# Altium PCB ECE315_S20.PcbDoc (part 1 of 2)
Units mil, origin at the board's own origin, x right, y up, seen from the top; angles counter-clockwise.
Board outline 3957.04 x 3960.03 mil, 2 copper layers (Top Layer, Bottom Layer); 148 components, 79 nets, 466 pads, 123 vias.
Unrouted connection lines stored in the file: 250.
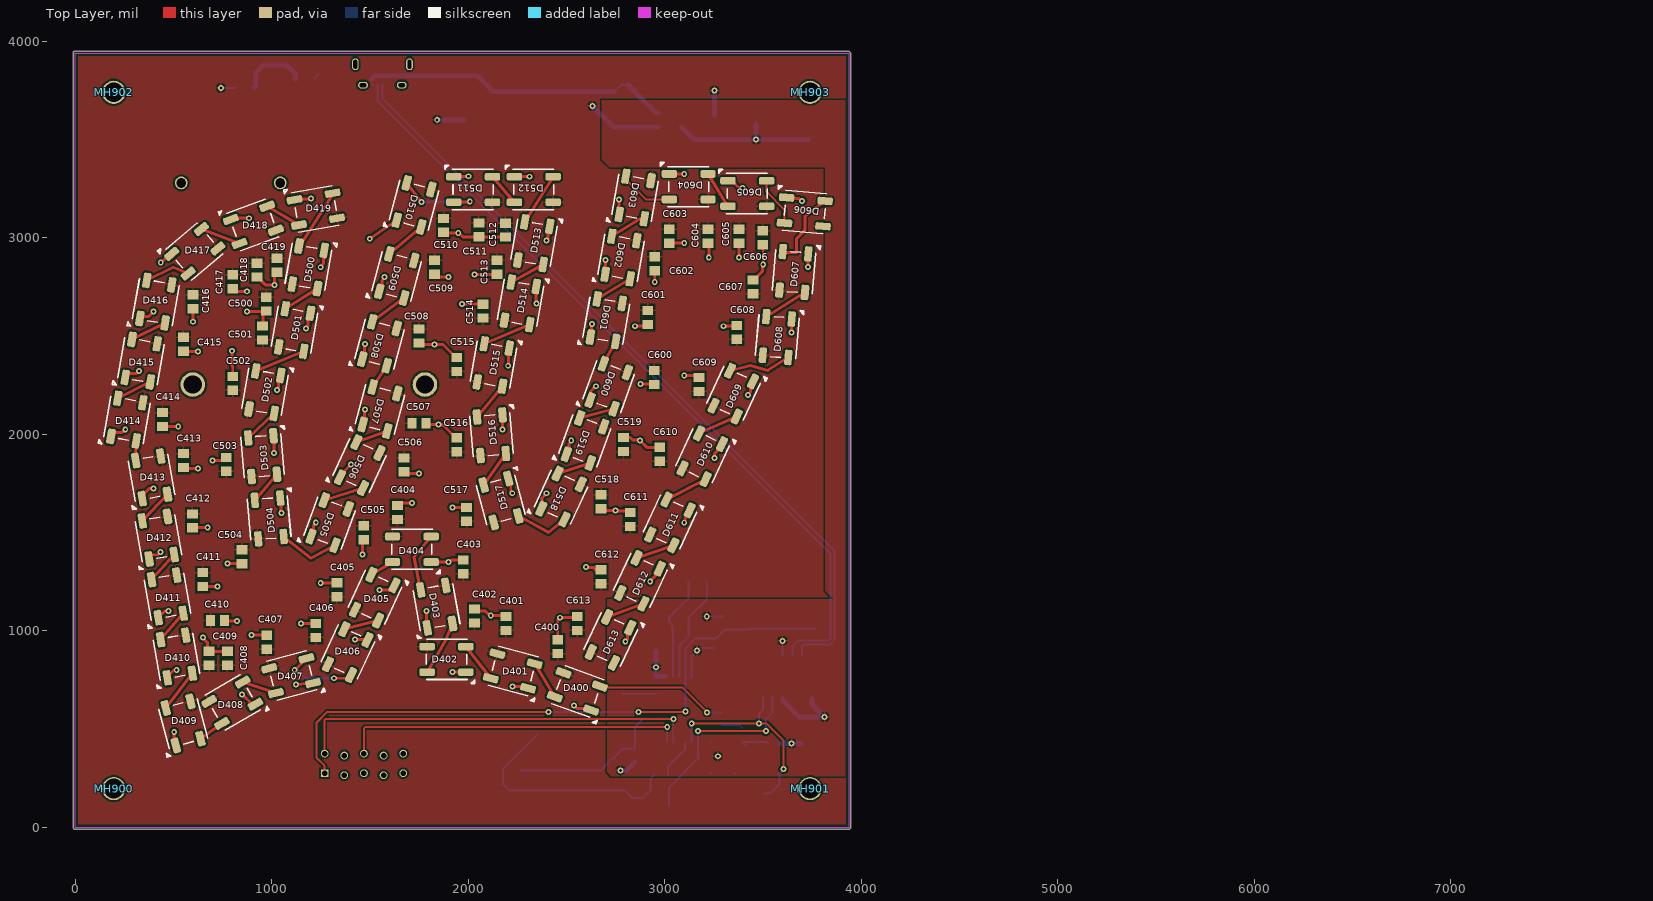
[diagram p0: Top Layer view]
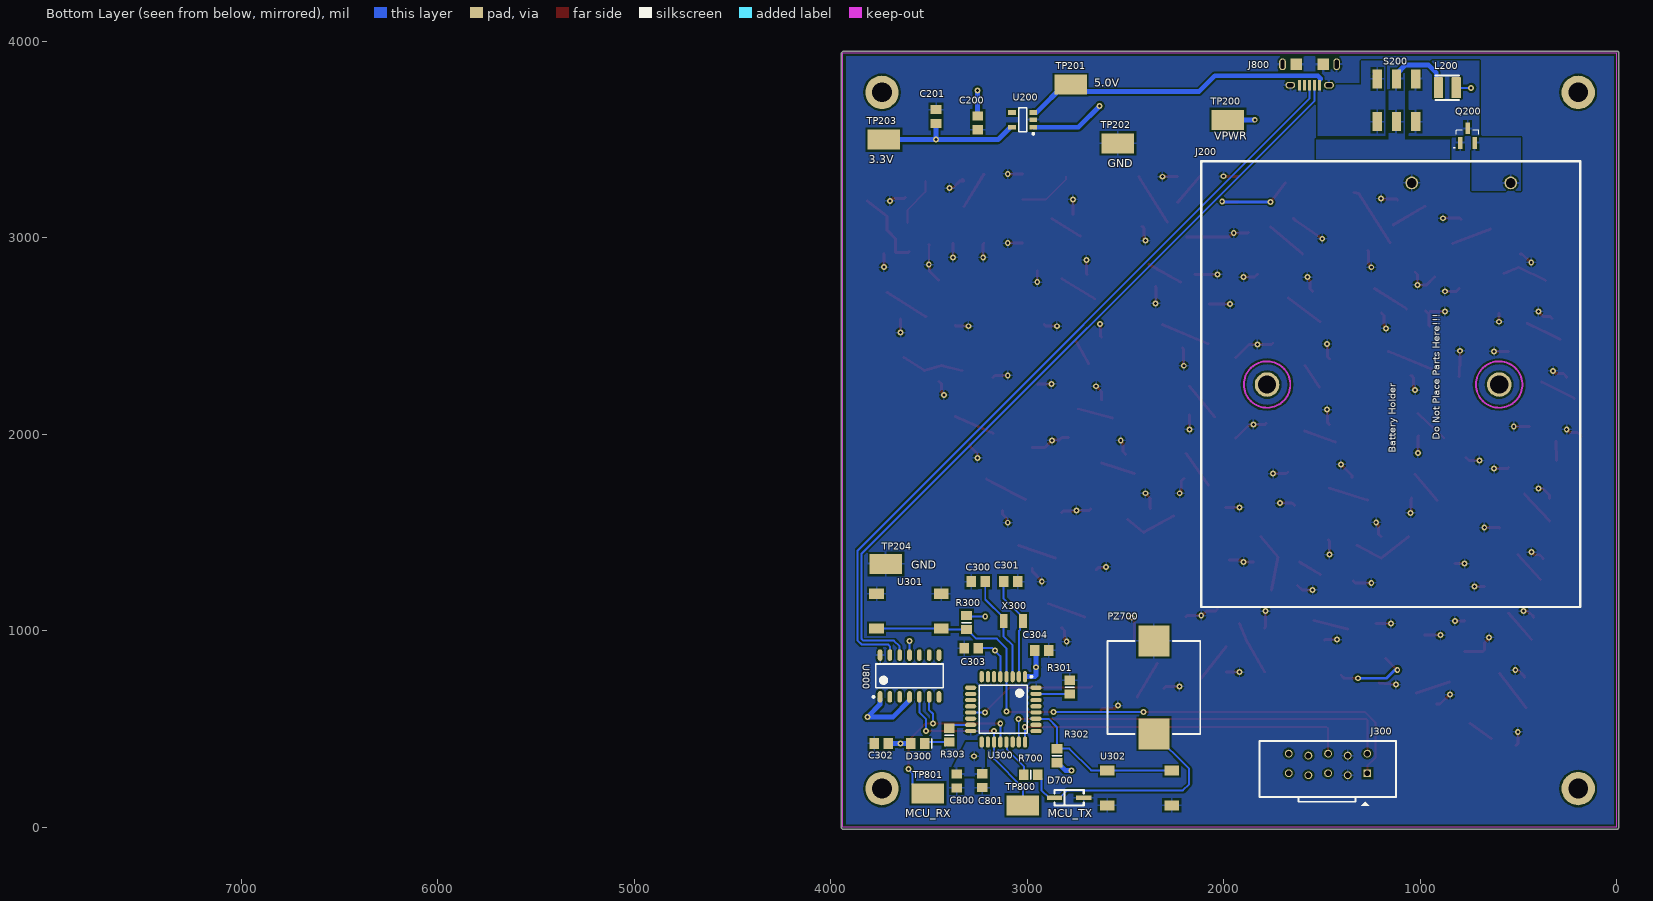
[diagram p1: Bottom Layer view, seen from below]
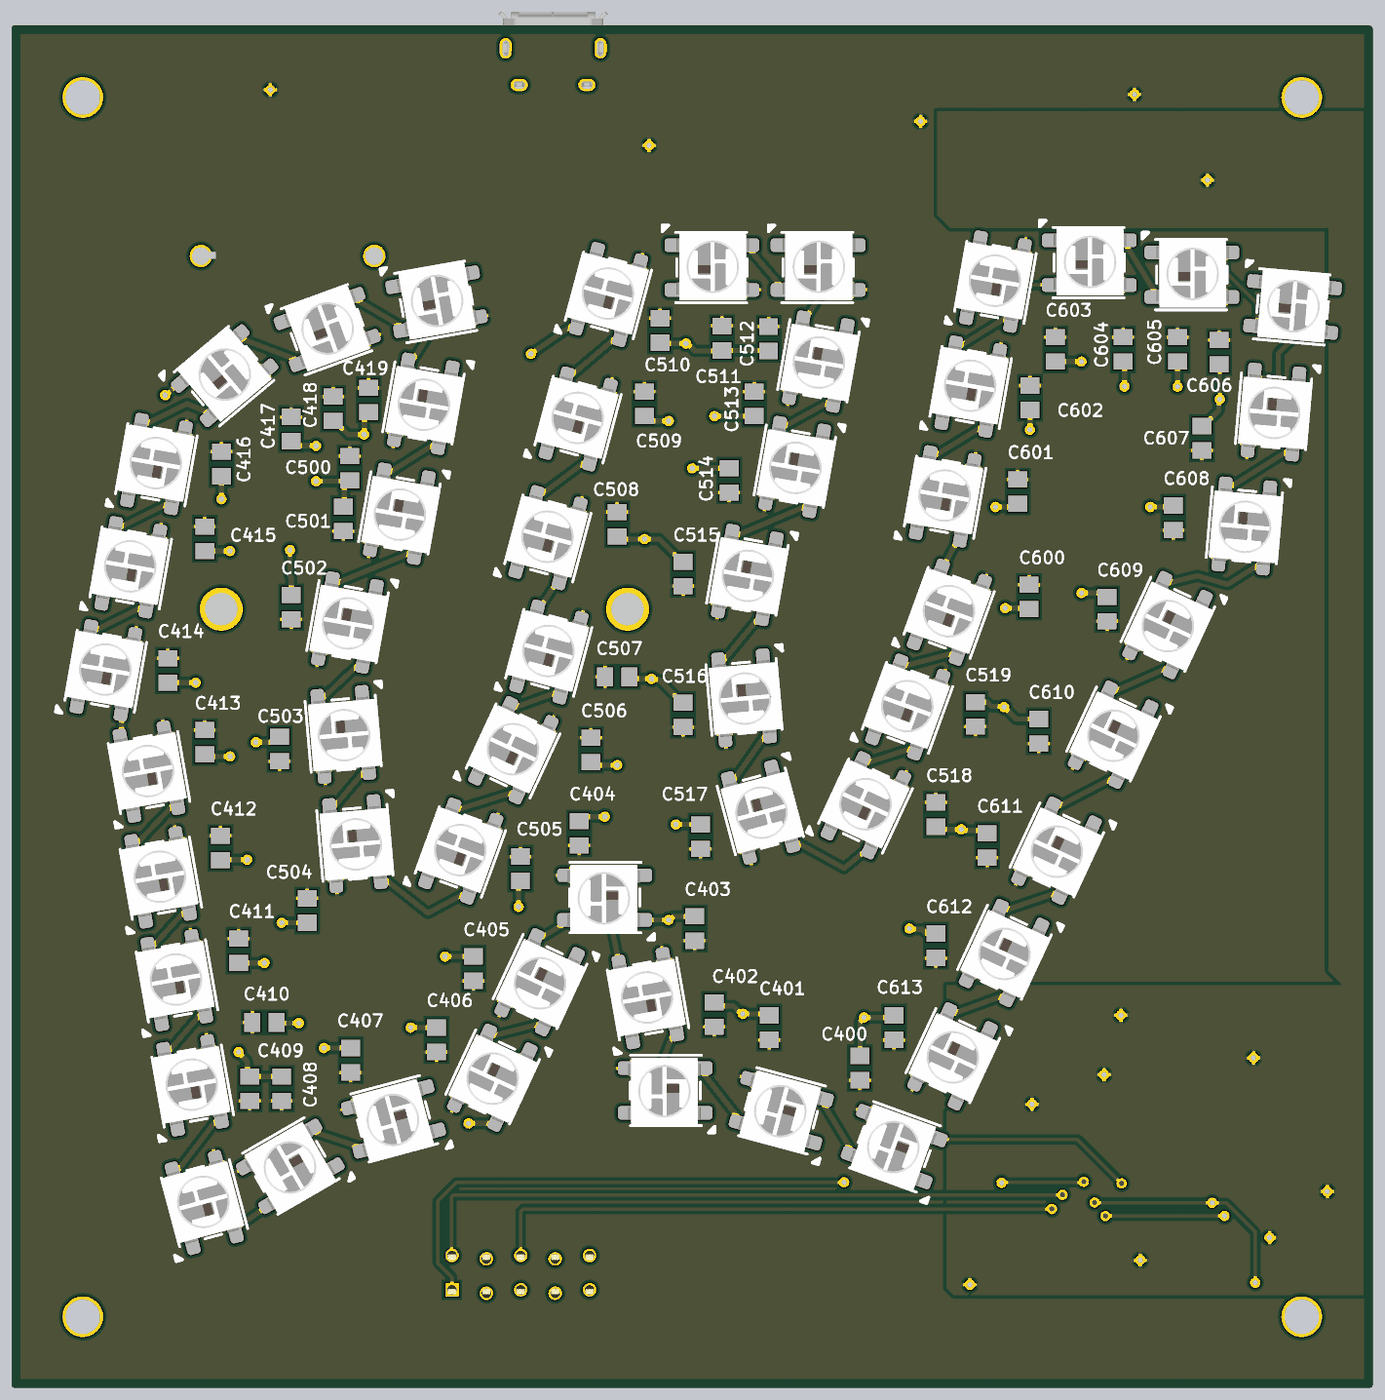
[diagram p2: 3D render of the assembled board from above, using the file's embedded part models]

## Layer stack, top to bottom
Top Solder: solder mask 0.4, Solder Resist, Dk 3.5
Top Layer: signal copper 1.4
Dielectric 1: dielectric 12.6, FR-4, Dk 4.8
Bottom Layer: signal copper 1.4
Bottom Solder: solder mask 0.4, Solder Resist, Dk 3.5

## Board outline
0,-10.02 cw(c0,0) -10.02,0 -10.02,3937.01 cw(c0,3937.01) -9.9,3938.5 cw(c0,3940) 0,3950.01 3934.02,3950.01 cw(c3934.02,3940) 3942.43,3945.43 cw(c3937.01,3937.01) 3947.02,3937.01 3947.02,0 cw(c3937.01,0) 3937.01,-10.02

## Design rules (kind name [scope] priority, off if disabled: settings)
BoardOutlineClearance [All] p1: gap=25 ignorepadtopadclearanceinfootprint=FALSE
Clearance [All] p1: gap=10 ignorepadtopadclearanceinfootprint=FALSE except(0: Arc-Hole Track-Hole SMDPad-Hole THPad-Hole Via-Hole Fill-Hole Poly-Hole Region-Hole Text-Hole; 9: Arc-SMDPad Track-SMDPad SMDPad-SMDPad)
ComponentClearance [All] p1 off: gap=10 collisioncheckmode=3 verticalgap=10 showdistances=FALSE
HoleSize [All] p1: absolutevalues=TRUE maxlimit=200 minlimit=15 maxpercent=80.000 minpercent=20.000
MinimumAnnularRing [All] p1: minimumring=6
MinimumSolderMaskSliver [All] p1: minsoldermaskwidth=0
PolygonConnect [All] p1: connectstyle=Relief reliefconductorwidth=10 reliefentries=4 polygonreliefangle="90 Angle" airgapwidth=10
RoutingCorners [All] p1: cornerstyle=Round minsetback=100 maxsetback=100
RoutingVias [All] p1: holewidth=15 width=30 viastyle="Through Hole" minholewidth=15 minwidth=30 maxholewidth=28 maxwidth=50
SilkToSilkClearance [All] p1: silktosilkclearance=1
SilkToSolderMaskClearance [IsPad] p1: minsilkscreentomaskgap=0 clearancetoexposedcopper=TRUE
SolderMaskExpansion [All] p1: expansion=4
Width Width-ArtWork [HasFootprint('BUCKYBADGER') or HasFootprint('Motion_W')] p1: maxlimit=100 minlimit=99999 preferedwidth=10 toplayer_minwidth=0 bottomlayer_minwidth=0 minimp=50.000000 maximp=50.000000 favimp=50.000000
Width Width_1 [All] p2: maxlimit=100 minlimit=10 preferedwidth=10 minimp=50.000000 maximp=50.000000 favimp=50.000000
24 further rules are at their usual default settings.

## Components (designator, comment, footprint, x,y, rotation, side; value= is the part's Value field where it differs from the comment)
C200 "10uF" CAP_0805 3252.8,3584.76 r90 bottom
C201 "10uF" CAP_0805 3464.9,3617 r270 bottom
C300 "CAP_0805_P_004.30" CAP_0805 3250,1250 r180 bottom
C301 "CAP_0805_P_004.30" CAP_0805 3085.16,1250 r0 bottom
C302 "10uF" CAP_0805 3743.7,426.62 r180 bottom
C303 "10uF" CAP_0805 3285.43,911.42 r180 bottom
C304 "10uF" CAP_0805 2926.84,900 r0 bottom
C400 "10uF" CAP_0805 2456.28,919.43 r270 top
C401 "10uF" CAP_0805 2192.46,1037.08 r270 top
C402 "10uF" CAP_0805 2032.59,1075 r270 top
C403 "10uF" CAP_0805 1975,1325 r270 top
C404 "10uF" CAP_0805 1640.11,1602.02 r270 top
C405 "10uF" CAP_0805 1332.27,1208.38 r270 top
C406 "10uF" CAP_0805 1225,1001.65 r270 top
C407 "10uF" CAP_0805 975,942.16 r270 top
C408 "10uF" CAP_0805 775,859.72 r270 top
C409 "10uF" CAP_0805 682.28,859.72 r270 top
C410 "10uF" CAP_0805 725,1052.37 r180 top
C411 "10uF" CAP_0805 650,1260.65 r90 top
C412 "10uF" CAP_0805 597.16,1559.3 r90 top
C413 "10uF" CAP_0805 551.33,1866.41 r90 top
C414 "10uF" CAP_0805 444.82,2075 r90 top
C415 "10uF" CAP_0805 551.33,2457.73 r90 top
C416 "10uF" CAP_0805 600,2675 r90 top
C417 "10uF" CAP_0805 802.5,2776.69 r90 top
C418 "10uF" CAP_0805 925,2835.43 r90 top
C419 "10uF" CAP_0805 1027.3,2860.78 r90 top
C500 "10uF" CAP_0805 972.99,2662.4 r90 top
C501 "10uF" CAP_0805 954.29,2515.55 r270 top
C502 "10uF" CAP_0805 802.5,2258.88 r270 top
C503 "10uF" CAP_0805 769,1846.87 r270 top
C504 "10uF" CAP_0805 849.35,1377.19 r90 top
C505 "10uF" CAP_0805 1469.16,1498.76 r90 top
C506 "10uF" CAP_0805 1674.29,1844.19 r90 top
C507 "10uF" CAP_0805 1750,2056.14 r180 top
C508 "10uF" CAP_0805 1750,2500 r90 top
C509 "10uF" CAP_0805 1829.76,2850 r90 top
C510 "10uF" CAP_0805 1875,3063.14 r90 top
C511 "10uF" CAP_0805 2054.76,3040.38 r90 top
C512 "10uF" CAP_0805 2190.25,3039.01 r90 top
C513 "10uF" CAP_0805 2147.99,2850 r90 top
C514 "10uF" CAP_0805 2075.73,2626.97 r270 top
C515 "10uF" CAP_0805 1942.04,2355.44 r270 top
C516 "10uF" CAP_0805 1942.04,1946.26 r270 top
C517 "10uF" CAP_0805 1992.23,1592.2 r270 top
C518 "10uF" CAP_0805 2676.9,1656.26 r90 top
C519 "10uF" CAP_0805 2790.92,1947.69 r270 top
C600 "10uF" CAP_0805 2947.35,2288.76 r90 top
C601 "10uF" CAP_0805 2914.35,2594.65 r90 top
C602 "10uF" CAP_0805 2950,2867.42 r90 top
C603 "10uF" CAP_0805 3024.18,3008.01 r90 top
C604 "10uF" CAP_0805 3221.03,3008.01 r90 top
C605 "10uF" CAP_0805 3379.31,3008.01 r90 top
C606 "10uF" CAP_0805 3500,3000 r90 top
C607 "10uF" CAP_0805 3450,2750 r270 top
C608 "10uF" CAP_0805 3367.28,2518.7 r270 top
C609 "10uF" CAP_0805 3174.63,2253.33 r270 top
C610 "10uF" CAP_0805 2975.47,1898.23 r270 top
C611 "10uF" CAP_0805 2825.47,1566.69 r270 top
C612 "10uF" CAP_0805 2676.9,1275 r270 top
C613 "10uF" CAP_0805 2555.16,1037.08 r270 top
C800 "10uF" CAP_0805 3360,235.85 r90 bottom
C801 "10uF" CAP_0805 3230,237.66 r90 bottom
D300 "LED_RED_0805.1" LED_RED_0805 3558.51,426.62 r0 bottom
D400 "WS2812B" WS2812B 2555.77,691.31 r340 top locked
D401 "WS2812B" WS2812B 2227.26,795.72 r345 top locked
D402 "WS2812B" WS2812B 1889.87,854.47 r0 top locked
D403 "WS2812B" WS2812B 1839.68,1122.73 r280 top locked
D404 "WS2812B" WS2812B 1713.79,1414.96 r0 top locked
D405 "WS2812B" WS2812B 1525,1169.02 r65 top locked
D406 "WS2812B" WS2812B 1387.16,891.66 r65 top locked
D407 "WS2812B" WS2812B 1100,771.5 r15 top locked
D408 "WS2812B" WS2812B 800,633.79 r30 top locked
D409 "WS2812B" WS2812B 550,528.99 r285 top locked
D410 "WS2812B" WS2812B 516.1,869.38 r280 top locked
D411 "WS2812B" WS2812B 470.27,1175 r280 top locked
D412 "WS2812B" WS2812B 423.39,1473.65 r280 top locked
D413 "WS2812B" WS2812B 389.2,1780.76 r280 top locked
D414 "WS2812B" WS2812B 263.99,2075 r260 top locked
D415 "WS2812B" WS2812B 336.56,2375 r260 top locked
D416 "WS2812B" WS2812B 411.08,2675 r260 top locked
D417 "WS2812B" WS2812B 609.24,2931.68 r220 top locked
D418 "WS2812B" WS2812B 907.24,3065.77 r200 top locked
D419 "WS2812B" WS2812B 1225,3146.42 r190 top locked
D500 "WS2812B" WS2812B 1186.64,2850 r80 top locked
D501 "WS2812B" WS2812B 1116.79,2530.5 r80 top locked
D502 "WS2812B" WS2812B 966.15,2214.35 r80 top locked
D503 "WS2812B" WS2812B 954.01,1888.97 r95 top locked
D504 "WS2812B" WS2812B 988.12,1571.72 r95 top locked
D505 "WS2812B" WS2812B 1295.41,1550 r250 top locked
D506 "WS2812B" WS2812B 1448.56,1843.09 r245 top locked
D507 "WS2812B" WS2812B 1551.89,2128.7 r255 top locked
D508 "WS2812B" WS2812B 1549.28,2460.79 r255 top locked
D509 "WS2812B" WS2812B 1637.05,2806.01 r255 top locked
D510 "WS2812B" WS2812B 1725.27,3167.61 r255 top locked
D511 "WS2812B" WS2812B 2025.73,3245.87 r180 top locked
D512 "WS2812B" WS2812B 2334.27,3245.87 r180 top locked
D513 "WS2812B" WS2812B 2334.84,2972.57 r80 top locked
D514 "WS2812B" WS2812B 2266.33,2666.29 r80 top locked
D515 "WS2812B" WS2812B 2128.43,2352.58 r80 top locked
D516 "WS2812B" WS2812B 2119.17,1995.32 r95 top locked
D517 "WS2812B" WS2812B 2166.93,1663.25 r105 top locked
D518 "WS2812B" WS2812B 2473.24,1683.34 r245 top locked
D519 "WS2812B" WS2812B 2594.98,1968.5 r250 top locked
D600 "WS2812B" WS2812B 2715.95,2244.37 r250 top locked
D601 "WS2812B" WS2812B 2703.78,2580.64 r260 top locked
D602 "WS2812B" WS2812B 2778.12,2899.79 r260 top locked
D603 "WS2812B" WS2812B 2850,3205 r260 top locked
D604 "WS2812B" WS2812B 3122.61,3259.99 r180 top locked
D605 "WS2812B" WS2812B 3420.85,3225.11 r180 top locked
D606 "WS2812B" WS2812B 3713.6,3131.38 r175 top locked
D607 "WS2812B" WS2812B 3658.02,2825.89 r85 top locked
D608 "WS2812B" WS2812B 3573.29,2494.86 r85 top locked
D609 "WS2812B" WS2812B 3350,2207.03 r65 top locked
D610 "WS2812B" WS2812B 3191.9,1888.25 r65 top locked
D611 "WS2812B" WS2812B 3027.31,1551.37 r65 top locked
D612 "WS2812B" WS2812B 2875,1254.18 r65 top locked
D613 "WS2812B" WS2812B 2725,953.61 r65 top locked
D700 "DIODE_4148" SOD323-12 2862.15,150 r270 bottom
J200 "BC3AAPC" BC3AAPC 185.95,1121.22 r90 bottom locked
J300 "SFH11-PBPC-D05-ST-BK" SFH11-PBPC-D05-ST-BK 1270,370 r0 bottom
J800 "USB_MICRO_B_10118194-0001LF" USB_MICRO_B 1563.9,3940 r0 bottom
L200 "SRN3015-220M" SRN3015 863.08,3763.9 r180 bottom
MH900 "MHOLE_2_55MM" MHOLE_2_55MM#1 225,200 r90 top
MH901 "MHOLE_2_55MM" MHOLE_2_55MM#2 3740.16,196.85 r90 top locked
MH902 "MHOLE_2_55MM" MHOLE_2_55MM#3 200,3760 r90 top
MH903 "MHOLE_2_55MM" MHOLE_2_55MM#4 3745,3735 r90 top
PZ700 "Peizo Buzzer" PKLCS 2356.65,712 r90 bottom
Q200 "PMOS-DMP2305U-7" SOT23 760,3520 r90 bottom
R300 "10K" RES_0805 3310.24,1042 r90 bottom
R301 "10K" RES_0805 2785,713.43 r270 bottom
R302 "10K" RES_0805 2850,364.57 r270 bottom
R303 "330" RES_0805 3397.4,468.94 r90 bottom
R700 "RES_0805_K_001.00" RES_0805 2982.65,267.66 r180 bottom
S200 "SW DPDT" DPDT 1121.85,3700 r180 bottom
TP200 "TP_1206" TP-SMC-1206 1980,3600 r180 bottom
TP201 "TP_1206" TP-SMC-1206 2780,3780 r180 bottom
TP202 "TP_1206" TP-SMC-1206 2540,3480 r180 bottom
TP203 "TP_1206" TP-SMC-1206 3730.46,3500 r180 bottom
TP204 "TP_1206" TP-SMC-1206 3720,1340 r0 bottom
TP800 "TP_1206" TP-SMC-1206 3023.55,111.42 r180 bottom
TP801 "TP_1206" TP-SMC-1206 3506.88,172.6 r180 bottom
U200 "IC-TLV733P" IC_TLV73333 3024.2,3600 r0 bottom
U300 "IC_STM32F303K8T6" LQFP32 3122.38,600 r270 bottom
U301 "SWITCH_6mm_6mm_smd" SWITCH_6mm_6mm_smd 3603.56,1100 r180 bottom
U302 "SWITCH_6mm_6mm_smd" SWITCH_6mm_6mm_smd 2430,200 r0 bottom
U800 "IC_MCP2221A" IC_MCP2221A 3600,770 r90 bottom
X300 "32.7680KHZ 12.5PF" NX3215SA-32.768K-STD-MUA-8 3071.39,1049.44 r0 bottom

## Footprints (in the part's own frame and the unit in brackets; to place one, negate y for a bottom-side part, rotate by r counter-clockwise, add the part's x,y. Pads: shape width x height; smd on the part's side, far side on the other; paste and mask are expansions set on the pad)
BC3AAPC [mm] "BATTERY HOLDER AA 3 CELL PC PIN"
  round 3.175 hole 2.37: 1(28.75,10.5) 2(28.75,40.5)
  round 1.651 hole 1.27: 3(54.82,9) 4(54.82,21.8)
  Top Layer keep-out circle w0.254: c28.75,10.5 r3
  Top Layer keep-out circle w0.254: c28.75,40.5 r3
  silkscreen extent 0,0 57.6,49, body extent 0.46,0.76 57.66,49.96, height 16.51
CAP_0805 [mm]
  rect 1.2x1.4 smd: 1(-0.9,0) 2(0.9,0)
  body extent -1.07,-0.7 1.07,0.7, height 0.7
DPDT [mm]
  rect 1.2x2.5 smd: 1(-2.5,-2.75) 2(0,-2.75) 3(2.5,-2.75) 4(-2.5,2.75) 5(0,2.75) 6(2.5,2.75)
IC_MCP2221A [mm] "SOIC, 14-Leads, Body 8.65x3.90mm, Pitch 1.27mm, IPC Medium Density"
  oval 1.5x0.6 smd: 1(-2.7,3.81) 2(-2.7,2.54) 3(-2.7,1.27) 4(-2.7,0) 5(-2.7,-1.27) 6(-2.7,-2.54) 7(-2.7,-3.81) 8(2.7,-3.81) 9(2.7,-2.54) 10(2.7,-1.27) 11(2.7,0) 12(2.7,1.27) 13(2.7,2.54) 14(2.7,3.81)
  silkscreen extent -2.82,-4.35 1.55,4.79, body extent -3,-4.35 3,4.35, height 1.75
IC_TLV73333 [mm] "SOT23, 5-Leads, Body 2.90x2.80mm, Pitch 0.95mm, IPC Medium Density"
  rect 1x0.6 smd: 1(-1.375,0.95) 2(-1.375,0) 3(-1.375,-0.95) 4(1.375,-0.95) 5(1.375,0.95)
  silkscreen extent -1.5,-1.55 0.5,1.92, body extent -1.5,-1.53 1.5,1.53, height 1.45
LED_RED_0805 [mm]
  rect 1.2x1.4 smd: 1(-0.9,0) 2(0.9,0)
  silkscreen extent -1.8,-0.6 -1.8,0.6, body extent -1.07,-0.7 1.08,0.7, height 0.8
LQFP32 [mm] "TQFP, 32-Leads, Body 7.00x7.00mm, Pitch 0.80mm, IPC Medium Density"
  oval 1.45x0.55 smd: 1(-4.225,2.8) 2(-4.225,2) 3(-4.225,1.2) 4(-4.225,0.4) 5(-4.225,-0.4) 6(-4.225,-1.2) 7(-4.225,-2) 8(-4.225,-2.8) 17(4.225,-2.8) 18(4.225,-2) 19(4.225,-1.2) 20(4.225,-0.4) 21(4.225,0.4) 22(4.225,1.2) 23(4.225,2) 24(4.225,2.8)
  oval 0.55x1.45 smd: 9(-2.8,-4.225) 10(-2,-4.225) 11(-1.2,-4.225) 12(-0.4,-4.225) 13(0.4,-4.225) 14(1.2,-4.225) 15(2,-4.225) 16(2.8,-4.225) 25(2.8,4.225) 26(2,4.225) 27(1.2,4.225) 28(0.4,4.225) 29(-0.4,4.225) 30(-1.2,4.225) 31(-2,4.225) 32(-2.8,4.225)
  silkscreen extent -4.35,-3.1 3.1,3.75, body extent -4.5,-4.5 4.5,4.5, height 1.6
MHOLE_2_55MM#1 [mm] "2.55MM Mounting Hole"
  round 3 / inner round 4.572 / far side round 4.318 hole 2.55: 1(-0.08,0.715)
MHOLE_2_55MM#2 [mm] "2.55MM Mounting Hole"
  round 3 / inner round 4.572 / far side round 4.318 hole 2.55: 1(0,0)
MHOLE_2_55MM#3 [mm] "2.55MM Mounting Hole"
  round 3 / inner round 4.572 / far side round 4.318 hole 2.55: 1(-0.504,0.08)
MHOLE_2_55MM#4 [mm] "2.55MM Mounting Hole"
  round 3 / inner round 4.572 / far side round 4.318 hole 2.55: 1(0.131,0.123)
NX3215SA-32.768K-STD-MUA-8 [mm]
  rect 1x1.8 smd: 1(-1.25,0) 2(1.25,0)
PKLCS [mm]
  rect 4x4 smd: 1(-6,0) 2(6,0)
  silkscreen extent -6,-6 6,6
RES_0805 [mm]
  rect 1.2x1.4 smd: 1(-0.9,0) 2(0.9,0)
  silkscreen extent 0,-0.6 0,0.6, body extent -1.07,-0.7 1.08,0.7, height 0.65
SFH11-PBPC-D05-ST-BK [mm]
  round 1 hole 0.7: 1(0,-0.127) 3(2.54,0.127) 4(2.54,2.667) 5(5.08,-0.127) 6(5.08,2.413) 7(7.62,0.127) 8(7.62,2.667) 9(10.16,-0.127) 10(10.16,2.413)
  rect 1x1 hole 0.7: 2(0,2.413)
  silkscreen extent -3.68,-1.78 13.97,9.4, body extent -3.73,-1.73 13.89,5.37, height 8.5
SOD323-12 [mm]
  rect 0.6x2 smd: 1(0,0) 2(0,3.75)
  silkscreen extent -1,0 1,3.8
SOT23 [mm]
  rect 1.5x0.6 smd: 1(-0.95,0.95) 2(-0.95,-0.95) 3(0.95,0)
  silkscreen extent -1.64,-1.45 0.7,1.76, body extent -1.4,-1.45 1.4,1.45, height 1.3
SRN3015 [mm]
  rrect10% 1.2x2.7 smd mask+0.102: 1(-1.15,0) 2(1.15,0)
  silkscreen extent -1.5,-1.6 1.5,1.6, body extent -1.51,-1.4 1.51,1.32, height 1.5
SWITCH_6mm_6mm_smd [mm]
  rect 1.9x1.3 smd: 1(-4.175,2.25) 2(4.175,2.25) 3(-4.175,-2.25) 4(4.175,-2.25)
  body extent -4.96,-3.02 5.04,2.98, height 4.42
TP-SMC-1206 [mm]
  rect 4.2x2.6 smd mask+0: 1(0,0)
  body extent -1.57,-0.79 1.63,0.81, height 1.22
USB_MICRO_B [mm]
  rect 0.4x1.35 smd: 1(-1.3,4.15) 2(-0.65,4.15) 3(0,4.15) 4(0.65,4.15) 5(1.3,4.15)
  rect 1.5x1.5 smd: SH1(-1.75,1.45) SH4(1.75,1.45)
  oval 0.889x1.524 hole 0.5 slot 1.15 at 90 deg: SH2(-3.5,1.45) SH5(3.5,1.45)
  oval 1.27x0.889 hole 0.55 slot 0.85 at 0 deg: SH3(-2.5,4.15) SH6(2.5,4.15)
  body extent -4.03,-1.27 4.02,4.31, height 16.51
WS2812B [mm]
  rrect50% 2x1 smd: 1(-2.5,1.65) 2(-2.5,-1.65) 3(2.5,-1.65) 4(2.5,1.65)
  silkscreen extent -2.6,-3.11 3.66,2.6, body extent -2.73,-2.53 2.62,2.42, height 1.7

## Part data
C200 C201 C302 C303 C304 C400 C401 C402 C403 C404 C405 C406 C407 C408 C409 C410 C411 C412 C413 C414 C415 C416 C417 C418 C419 C500 C501 C502 C503 C504 C505 C506 C507 C508 C509 C510 C511 C512 C513 C514 C515 C516 C517 C518 C519 C600 C601 C602 C603 C604 C605 C606 C607 C608 C609 C610 C611 C612 C613 C800 C801: library part CAP_0805_U_010.00, "CAP CER 10UF 16V X7R 0805", Case Code (Imperial)=0805, Case Code (Metric)=2012, Dielectric=X5R, Manufacturer=Samsung, Manufacturer Part Number=CL21A106KPCLQNC, Max Operating Temperature=85°C, Min Operating Temperature=-55°C, Package Quantity=1, Supplier Part Number 1=1276-2402-1-ND, Tolerance=10%, Voltage Rating=10V, Capacitance=10uF, Case/Package=0805, ComponentLink1Description=https://datasheet.ciiva.com/25730/cl21a106kpclqnc-25730594.pdf, ComponentLink1URL=https://datasheet.ciiva.com/25730/cl21a106kpclqnc-25730594.pdf, ComponentLink3Description=https://datasheet.ciiva.com/26920/getdatasheetpartid-355170-26920201.pdf, ComponentLink3URL=https://datasheet.ciiva.com/26920/getdatasheetpartid-355170-26920201.pdf, Contact Plating=Tin, Depth=1.25mm, Height=0.85mm, Length=2mm, Mount="Surface Mount", Packaging="Tape and Reel", Pricing 1="1=0.22, 10=0.148, 100=0.0749, 500=0.05122, 1000=0.04531 (USD)", Radiation Hardening=No, Stock 1=40000, Supplier 1=Digi-Key, Thickness=0.037inch, Width=0.049inch
C300 C301: "CAP CER 4.3PF 100V NP0 0805", Capacitance Value="4.3 pF", Dielectric=C0G, Manufacturer="Kyocera AVX", Manufacturer Part Number=08051A4R3CAT2A, Operating Temperature="-55 to 125 °C", Package/Case=0805, Supplier Part Number 1=478-10404-1-ND, Tolerance="0.25 pF", Voltage="100 Vdc", Category="Capacitor Ceramic Multilayer", ComponentLink1Description=https://datasheet.ciiva.com/204/ccog-204944.pdf, ComponentLink1URL=https://datasheet.ciiva.com/204/ccog-204944.pdf, ComponentLink2Description=https://datasheet.ciiva.com/11570/ccog-11570969.pdf, ComponentLink2URL=https://datasheet.ciiva.com/11570/ccog-11570969.pdf, Construction=Flat, Mounting="Surface Mount", Packaging="Tape & Reel", Pricing 1="1=0.24, 10=0.167, 100=0.0946, 500=0.0668, 1000=0.0584 (USD)", Product Depth="1.25 mm", Product Length="2.01 mm", Rad Hard=No, Stock 1=23910, Supplier 1=Digi-Key
D300: "LED SUPER RED CLR THIN 0805 SMD", Emitting Color=Red, Forward Current="30 mA", Forward Voltage="2.4 V", Manufacturer="Vishay / Lite-On", Manufacturer Part Number=LTST-C171KRKT, Operating Temp Range="-55C to 85C", Operating Temperature Classification=Industrial, Package Type="Chip Led", Power Dissipation="75 W", Reverse Voltage="5 V", Supplier Part Number 1=160-1427-1-ND, Test Current (It)="20 mA", Chip Material=AlGaInP, ComponentLink1Description=https://datasheet.ciiva.com/2110/s-110-ltst-c171krkt-2110066.pdf, ComponentLink1URL=https://datasheet.ciiva.com/2110/s-110-ltst-c171krkt-2110066.pdf, ComponentLink2Description=https://datasheet.ciiva.com/2110/s-110-ltst-c171krkt-2110067.pdf, ComponentLink2URL=https://datasheet.ciiva.com/2110/s-110-ltst-c171krkt-2110067.pdf, ComponentLink3Description=https://datasheet.ciiva.com/2110/s-110-ltst-c171krkt-2110068.pdf, ComponentLink3URL=https://datasheet.ciiva.com/2110/s-110-ltst-c171krkt-2110068.pdf, ComponentLink4Description=https://datasheet.ciiva.com/12403/lite-on-ltst-c171krkt-187201-12403781.pdf, ComponentLink4URL=https://datasheet.ciiva.com/12403/lite-on-ltst-c171krkt-187201-12403781.pdf, ComponentLink5Description=https://datasheet.ciiva.com/11775/0900766b80dc0299-11775643.pdf, ComponentLink5URL=https://datasheet.ciiva.com/11775/0900766b80dc0299-11775643.pdf, ComponentLink6Description=https://datasheet.ciiva.com/16444/lite-on20ltst-c171krkt-16444779.pdf, ComponentLink6URL=https://datasheet.ciiva.com/16444/lite-on20ltst-c171krkt-16444779.pdf, DELETED=Compliant, Dominant Wave Length="631 nm", High Brightness=Yes, Lens Dimensions="1.4x1.25x0.5 mm", Lum Intensity=54mcd, Luminous Intensity=54mcd, Main Category="Chip LED", Mounting="Surface Mount", Number of  Elements=1, Packaging="Tape and Reel", Peak Wavelength="639 nm", Pin Count=2, Pricing 1="1=0.31, 10=0.225, 25=0.1656, 100=0.1183, 250=0.0804, 500=0.071, 1000=0.0556 (USD)", Product Depth (mm)="1.25 mm", Product Height (mm)="0.8 mm", Product Length (mm)="2 mm", Rad Hardened=No, Shape Type=Rectangular, Stock 1=97347, Supplier 1=Digikey, Type=Uni-Color, Viewing Angle="130 deg"
D400 D401 D402 D403 D404 D405 D406 D407 D408 D409 D410 D411 D412 D413 D414 D415 D416 D417 D418 D419 D500 D501 D502 D503 D504 D505 D506 D507 D508 D509 D510 D511 D512 D513 D514 D515 D516 D517 D518 D519 D600 D601 D602 D603 D604 D605 D606 D607 D608 D609 D610 D611 D612 D613: "LED RGB WS2812B", Manufacturer Part Number=EBAY, Rating=3.5V-5.3V
D700: "DIODE GEN PURP 100V 300MA SOD123", Manufacturer=Diodes, Manufacturer Part Number=1N4148W--7-F, Maximum Forward Voltage=1.25V, Maximum Reverse Voltage=100V, Package Type=SOD-123, Supplier Part Number 1=1N4148W-FDICT-ND, ComponentLink1Description=http://uk.rs-online.com/webdocs/0f8c/0900766b80f8c94e.pdf, ComponentLink1URL=http://uk.rs-online.com/webdocs/0f8c/0900766b80f8c94e.pdf, Diode Configuration=Single, Mounting Type="Surface Mount", Number of Elements per Chip=1, Pin Count=2, Pricing 1="1=0.18, 10=0.164, 100=0.0891, 500=0.0548, 1000=0.0374 (USD)", Stock 1=993734, Supplier 1=Digi-Key
J200: "BATTERY HOLDER AA 3 CELL PC PIN", Manufacturer="Memory Protection Devices", Max Operating Temperature=100°C, Min Operating Temperature=-10°C, Package Quantity=100, Supplier Part Number=BC3AAPC-ND, ComponentLink1Description=http://www.memoryprotectiondevices.com/datasheets/BC3AAPC-datasheet.pdf?src-supplier=Digi-Key, ComponentLink1URL=http://www.memoryprotectiondevices.com/datasheets/BC3AAPC-datasheet.pdf?src-supplier=Digi-Key, Manufacturer Part Number=BC3AAPC, Mount="Through Hole,PCB", Number of Cells=3, Supplier=Digi-Key, Termination="PC Pin"
J300: "CONN HDR 10POS 0.1 GOLD PCB", Color=Black, Manufacturer 1=Sullins, Package Quantity=1, Supplier Part Number 1=S9194-ND, ComponentLink1Description=https://datasheet.ciiva.com/754/sfh11-pxxc-dxx-st-xx11160-c-754555.pdf?src-supplier=Digi-Key, ComponentLink1URL=https://datasheet.ciiva.com/754/sfh11-pxxc-dxx-st-xx11160-c-754555.pdf?src-supplier=Digi-Key, Connector Type=Header, Contact Plating=Gold, Lead Free="Lead Free", Manufacturer Part Number 1=SFH11-PBPC-D05-ST-BK, Mount="Through Hole", Number of Positions=10, Number of Rows=2, Packaging=Tray, Pitch=0.1inch, Pricing 1="1=0.66000, 10=0.57600, 100=0.49700, 500=0.40662, 1000=0.36144, 5000=0.32630 (USD)", RoHS=Yes, Row Spacing=0.1inch, Stock 1=26289, Supplier 1=Digi-Key, Termination=Solder
J800: "CONN USB MICRO B RECPT SMT R/A", Color=Black, Current Rating=1.8A, Flammability Rating="UL94 V-0", Insulation Resistance=1GR, Manufacturer="Amphenol FCI", Manufacturer Part Number=10118194-0001LF, Max Operating Temperature=85°C, Max Voltage Rating (AC)=100V, Min Operating Temperature=-55°C, Package Quantity=9600, Supplier Part Number=609-4618-1-ND, Connector Type=USB,Receptacle, Contact Material="Copper Alloy", Contact Plating=Gold, Depth=5mm, Features=Shielded, Gender=Receptacle, Housing Material=Polymer, Lead Free="Lead Free", Length=8.05mm, Mount="Surface Mount,Horizontal", Number of Contacts=5, Number of Ports=1, Number of Terminals=5, Orientation="Right Angle", Packaging="Tape and Reel", Pitch=0.65mm, Radiation Hardening=No, Supplier=Digi-Key, Termination=Solder
L200: "22uH 3x3mm sheilded inductor 600mA", Case/Package=1212, Current Rating=600mA, DC Resistance (DCR)=622mR, Inductance=22uH, Inductance Tolerance=20%, Manufacturer 1=Bourns, Max Operating Temperature=125°C, Min Operating Temperature=-40°C, Package Quantity=2000, Saturation Current=580mA, Self Resonant Frequency=28MHz, Supplier Part Number 1=SRN3015-220MCT-ND, Test Frequency=1MHz, ComponentLink1Description=https://datasheet.ciiva.com/11802/0900766b80fe1f40-11802602.pdf?src-supplier=RSComponents, ComponentLink1URL=https://datasheet.ciiva.com/11802/0900766b80fe1f40-11802602.pdf?src-supplier=RSComponents, ComponentLink2Description=https://datasheet.ciiva.com/1048/srn3015-1048848.pdf?src-supplier=Digi-Key, ComponentLink2URL=https://datasheet.ciiva.com/1048/srn3015-1048848.pdf?src-supplier=Digi-Key, ComponentLink3Description=https://datasheet.ciiva.com/1048/srn3015-1048849.pdf?src-supplier=Digi-Key, ComponentLink3URL=https://datasheet.ciiva.com/1048/srn3015-1048849.pdf?src-supplier=Digi-Key, ComponentLink4Description=https://datasheet.ciiva.com/1048/srn3015-1048850.pdf?src-supplier=Digi-Key, ComponentLink4URL=https://datasheet.ciiva.com/1048/srn3015-1048850.pdf?src-supplier=Digi-Key, ComponentLink5Description=https://datasheet.ciiva.com/30089/587srn3015-30089590.pdf?src-supplier=Onlinecomponents.com, ComponentLink5URL=https://datasheet.ciiva.com/30089/587srn3015-30089590.pdf?src-supplier=Onlinecomponents.com, ComponentLink6Description=https://datasheet.ciiva.com/7849/1481208-7849511.pdf?src-supplier=Element14, ComponentLink6URL=https://datasheet.ciiva.com/7849/1481208-7849511.pdf?src-supplier=Element14, ComponentLink7Description=https://datasheet.ciiva.com/22678/1875284-22678991.pdf?src-supplier=Element14, ComponentLink7URL=https://datasheet.ciiva.com/22678/1875284-22678991.pdf?src-supplier=Element14, Composition=Wirewound, Contact Plating=Tin, Core Material=Ferrite, DC Current=600mA, Depth=3.1mm, Height=1.5mm, Height - Seated (Max)=0.059inch, Length=3.1mm, Manufacturer Part Number 1=SRN3015-220M, Max DC Current=600mA, Military Standard=Not, Number of Pins=2, Packaging="Tape and Reel", Pricing 1="1=0.46000, 10=0.40300, 100=0.28750, 500=0.24150, 1000=0.19550 (USD)", REACH SVHC="No SVHC", RMS Current (Irms)=600mA, RoHS=Yes, Shielding=Shielded, Stock 1=46536, Supplier 1=Digi-Key, Termination=SMD/SMT, Tolerance=20%, Weight=0.001235oz, Width=0.118inch
MH900 MH901 MH902 MH903: "Mounting Holde", Manufacturer Part Number="UW MTHOLE"
PZ700: library part Peizo, "AUDIO PIEZO TRANSDUCER 12.5V SMD", Frequency=2kHz, Manufacturer="Murata Electronics North America", Manufacturer Part Number=PKLCS1212E2000-R1, Operating Mode="Single Tone", Operating Temperature="-20°C ~ 70°C", Supplier Part Number=490-5260-1-ND, Voltage - Rated=1.5V, Voltage Range="12.5V (Max)", Category="Audio Products", Driver Circuitry="Transducer, Externally Driven", Input Type="Zero-Peak Signal", Mounting Type="Surface Mount", Packaging="Cut Tape (CT)", Port Location=Side, RoHS="RoHS Compliant", Size / Dimension="12.0mm L x 12.0mm W x 3.0mm H", Sound Pressure Level="70dB @ 1.5V, 10cm", Supplier=Digi-Key, Technology=Piezo, Termination="Solder Pads"
Q200: "MOSFET P-CH 20V 4.2A SOT-23", Case/Package=SOT-23, Continuous Drain Current (ID)=4.2A, Drain to Source Breakdown Voltage=-20V, Drain to Source Resistance=60mR, Drain to Source Voltage (Vdss)=20V, Gate to Source Voltage (Vgs)=8V, Input Capacitance=727pF, Manufacturer="Diodes Zetex", Manufacturer Part Number=DMP2305U-7, Max Operating Temperature=150°C, Max Power Dissipation=1.4W, Min Operating Temperature=-55°C, Package Quantity=3000, Supplier Part Number=DMP2305UDICT-ND, Threshold Voltage=-500mV, ComponentLink1Description="Manufacturer Link", ComponentLink1URL=http://www.irf.com/, ComponentLink2Description=http://www.diodes.com/_files/datasheets/ds30149.pdf?src-supplier=Future+Electronics, ComponentLink2URL=http://www.diodes.com/_files/datasheets/ds30149.pdf?src-supplier=Future+Electronics, ComponentLink3Description=http://www.diodes.com/datasheets/ds31737.pdf?src-supplier=Avnet+Asia, ComponentLink3URL=http://www.diodes.com/datasheets/ds31737.pdf?src-supplier=Avnet+Asia, Contact Plating=Tin,Matte, Element Configuration=Single, Fall Time=13ns, Height=1mm, Lead Free="Lead Free", Length=2.9mm, Mount="Surface Mount", Number of Channels=1, Number of Elements=1, Number of Pins=3, On-State Resistance=60mR, Packaging="Tape and Reel", Power Dissipation=1.4W, Radiation Hardening=No, Rds On Max=60mR, REACH SVHC="No SVHC", Rise Time=13ns, Supplier=Digi-Key, Turn-Off Delay Time=53.8ns, Turn-On Delay Time=14ns, Weight=0.000282oz, Width=1.3mm
R300 R301 R302: library part RES_0805_K_010.00, "RES SMD 10K OHM 1% 1/8W 0805", Manufacturer="Panasonic / Panasonic ECG", Manufacturer Part Number=ERJ-6ENF1002V, Power Rating=125mW, Resistance=10k, Resistance Tolerance="± 1%", Resistor Case Style=0805, Resistor Element Material="Thick Film", Resistor Mounting=SMD, Supplier Part Number 1=P10.0KCCT-ND, Temperature Coefficient="± 200ppm/°C", Voltage Rating=150V, ComponentLink10Description=https://datasheet.ciiva.com/30140/aoa0000ce2-30140236.pdf, ComponentLink10URL=https://datasheet.ciiva.com/30140/aoa0000ce2-30140236.pdf, ComponentLink11Description=https://datasheet.ciiva.com/16740/aoa0000ce2-16740669.pdf, ComponentLink11URL=https://datasheet.ciiva.com/16740/aoa0000ce2-16740669.pdf, ComponentLink12Description=https://datasheet.ciiva.com/24070/aoa0000ce2-24070702.pdf, ComponentLink12URL=https://datasheet.ciiva.com/24070/aoa0000ce2-24070702.pdf, ComponentLink1Description=https://datasheet.ciiva.com/11808/0900766b80f80784-11808080.pdf, ComponentLink1URL=https://datasheet.ciiva.com/11808/0900766b80f80784-11808080.pdf, ComponentLink2Description=https://datasheet.ciiva.com/16514/aoa0000ce2-16514021.pdf, ComponentLink2URL=https://datasheet.ciiva.com/16514/aoa0000ce2-16514021.pdf, ComponentLink3Description=https://datasheet.ciiva.com/27055/1988971-27055733.pdf, ComponentLink3URL=https://datasheet.ciiva.com/27055/1988971-27055733.pdf, ComponentLink4Description=https://datasheet.ciiva.com/16759/70260748-16759350.pdf, ComponentLink4URL=https://datasheet.ciiva.com/16759/70260748-16759350.pdf, ComponentLink5Description=https://datasheet.ciiva.com/16725/70260748-16725031.pdf, ComponentLink5URL=https://datasheet.ciiva.com/16725/70260748-16725031.pdf, ComponentLink6Description=https://datasheet.ciiva.com/7830/426256-7830745.pdf, ComponentLink6URL=https://datasheet.ciiva.com/7830/426256-7830745.pdf, ComponentLink7Description=https://datasheet.ciiva.com/46372/1678782-46372714.pdf, ComponentLink7URL=https://datasheet.ciiva.com/46372/1678782-46372714.pdf, ComponentLink8Description=https://datasheet.ciiva.com/46372/1678782-46372715.pdf, ComponentLink8URL=https://datasheet.ciiva.com/46372/1678782-46372715.pdf, ComponentLink9Description=https://datasheet.ciiva.com/17212/aoa0000ce2-17212108.pdf, ComponentLink9URL=https://datasheet.ciiva.com/17212/aoa0000ce2-17212108.pdf, No. of Pins=2, Pricing 1="1=0.1, 10=0.041, 100=0.0167, 1000=0.0075, 2500=0.0065 (USD)", Product Range="PANASONIC - ERJ Series", Resistor Element Type="Thick Film", Series=ERJ, Stock 1=87, Supplier 1=Digikey
R303: library part RES_0805_R_330.00, "RES SMD 330 OHM 1% 1/8W 0805", Manufacturer="Panasonic / Panasonic ECG", Manufacturer Part Number=ERJ-6ENF3300V, Power Rating=125mW, Resistance Tolerance="± 1%", Resistor Case Style="0805 ^2012 Metric]", Resistor Element Type="Thick Film", Supplier Part Number 1=P330CCT-ND, Temperature Coefficient="± 200ppm/°C", Voltage Rating=150V, ComponentLink10Description=https://datasheet.ciiva.com/28590/1678782-28590783.pdf, ComponentLink10URL=https://datasheet.ciiva.com/28590/1678782-28590783.pdf, ComponentLink1Description=https://datasheet.ciiva.com/11821/0900766b80f80784-11821635.pdf, ComponentLink1URL=https://datasheet.ciiva.com/11821/0900766b80f80784-11821635.pdf, ComponentLink2Description=https://datasheet.ciiva.com/30131/aoa0000ce2-30131349.pdf, ComponentLink2URL=https://datasheet.ciiva.com/30131/aoa0000ce2-30131349.pdf, ComponentLink3Description=https://datasheet.ciiva.com/24025/aoa0000ce2-24025991.pdf, ComponentLink3URL=https://datasheet.ciiva.com/24025/aoa0000ce2-24025991.pdf, ComponentLink4Description=https://datasheet.ciiva.com/17206/aoa0000ce2-17206152.pdf, ComponentLink4URL=https://datasheet.ciiva.com/17206/aoa0000ce2-17206152.pdf, ComponentLink5Description=https://datasheet.ciiva.com/46436/1678782-46436633.pdf, ComponentLink5URL=https://datasheet.ciiva.com/46436/1678782-46436633.pdf, ComponentLink6Description=https://datasheet.ciiva.com/46436/1678782-46436634.pdf, ComponentLink6URL=https://datasheet.ciiva.com/46436/1678782-46436634.pdf, ComponentLink7Description=https://datasheet.ciiva.com/16760/70260748-16760668.pdf, ComponentLink7URL=https://datasheet.ciiva.com/16760/70260748-16760668.pdf, ComponentLink8Description=https://datasheet.ciiva.com/16780/70260748-16780764.pdf, ComponentLink8URL=https://datasheet.ciiva.com/16780/70260748-16780764.pdf, ComponentLink9Description=https://datasheet.ciiva.com/22684/1678782-22684798.pdf, ComponentLink9URL=https://datasheet.ciiva.com/22684/1678782-22684798.pdf, Packaging="Full Reel", Pricing 1="1=0.1, 10=0.041, 100=0.0167, 1000=0.0075, 2500=0.0065 (USD)", Product Range="PANASONIC - ERJ Series", Resistance=330, Stock 1=233511, Supplier 1=Digikey, SVHC="To Be Advised"
R700: "RES SMD 1K OHM 1% 1/8W 0805", Manufacturer="Panasonic Electronic Components", Manufacturer Part Number=ERJ-6ENF1001V, Operating Temperature="-55°C ~ 155°C", Package / Case="0805 (2012 Metric)", Power (Watts)="0.125W, 1/8W", Resistance (Ohms)=1k, Supplier Device Package=0805, Supplier Part Number=P1.00KCCT-ND, Temperature Coefficient=±100ppm/°C, Tolerance=±1%, Category=Resistors, Composition="Thick Film", Failure Rate=-, Features="Automotive AEC-Q200", Height - Seated (Max)="0.028\" (0.70mm)", Number of Terminations=2, Packaging="Cut Tape (CT)", Part Status=Active, RoHS="RoHS Compliant", Size / Dimension="0.079\" L x 0.049\" W (2.00mm x 1.25mm)", Supplier=Digi-Key
S200: "Switch", Actuator Color=Black, Contact Rating @ Voltage="0.3@6VDC A", Dielectric Strength="500 VAC", Manufacturer="ITT /  C&K Components", Manufacturer Part Number=JS202011SCQN, Maximum AC Voltage Rating=N/A, Maximum Contact Resistance="70 mOhm", Maximum DC Voltage Rating="6 V", Minimum Insulation Resistance="100 MOhm", Operating Temperature="-40 to 85 C", Supplier Part Number 1=401-2002-1-ND, Actuator Material="Nylon 4/6", Actuator Style="Top Slide", Base Material=N/A, Body Orientation=Straight, Code_IPC=SOT26A-6, Code_JEITA=SC-74, ComponentLink1Description=https://datasheet.ciiva.com/23829/1707718-23829488.pdf, ComponentLink1URL=https://datasheet.ciiva.com/23829/1707718-23829488.pdf, ComponentLink2Description=https://datasheet.ciiva.com/2889/js-29aug13-2889127.pdf, ComponentLink2URL=https://datasheet.ciiva.com/2889/js-29aug13-2889127.pdf, ComponentLink3Description=https://datasheet.ciiva.com/2889/js-15sept15-2889128.pdf, ComponentLink3URL=https://datasheet.ciiva.com/2889/js-15sept15-2889128.pdf, ComponentLink4Description=https://datasheet.ciiva.com/2889/js-15sept15-2889129.pdf, ComponentLink4URL=https://datasheet.ciiva.com/2889/js-15sept15-2889129.pdf, ComponentLink5Description=https://datasheet.ciiva.com/22630/1707718-22630697.pdf, ComponentLink5URL=https://datasheet.ciiva.com/22630/1707718-22630697.pdf, ComponentLink6Description=https://datasheet.ciiva.com/8625/js-9dec14-8625470.pdf, ComponentLink6URL=https://datasheet.ciiva.com/8625/js-9dec14-8625470.pdf, Contact Material="Copper Alloy", Contact Plating=Silver, COO=US, Dimension="9 x 7.5 x 5.5 mm", ECCN=EAR99, Electrical Life="15000 Cycles", Family=JS, Housing Material="Nylon 4/6", HTS=8536509050, LatestRevisionDate=29-May-2009, LatestRevisionNote="IPC-7351 Footprint Added.", Mechanical Life=N/A, Mounting="Surface Mount,Gull Wing", PackageDescription="6-Pin SOT-23 Package 0.95 mm Pitch, 2.7 mm Lead Span", PackageReference=SOT23-6, PackageVersion=Mar-2001, Packaging="Tape and Reel", Part No=JS202011SCQN, Pole Throw Configuration=DPDT, Pricing 1="1=0.46, 10=0.441, 25=0.4316, 50=0.3858, 100=0.3674, 250=0.3582, 500=0.3031 (USD)", Product Weight=N/A, Published=24-Mar-1999, Publisher="Altium Limited", RoHS=Yes, Seal Description=N/A, Seal Location=N/A, Stock 1=22661, Supplier 1="C&K Components", Supplier Standard Pack=5,000, Switch Configuration=N/A, Type=Sub-Miniature
TP200 TP201 TP202 TP203 TP204 TP800 TP801: "Test Point SMD 1206", Case Size=1206, Manufacturer="TE Connectivity (Tyco Electronics)", Manufacturer Part Number=1625854-1, Operating Temperature="-55 to 125 C", Power Rating=N/R, Resistance Value="0 Ohm", Supplier Part Number 1=A106143CT-ND, ComponentLink1Description=https://datasheet.ciiva.com/6439/eng-ds-1773266-a-6439169.pdf, ComponentLink1URL=https://datasheet.ciiva.com/6439/eng-ds-1773266-a-6439169.pdf, ComponentLink2Description=https://datasheet.ciiva.com/30136/1773266-a-30136341.pdf, ComponentLink2URL=https://datasheet.ciiva.com/30136/1773266-a-30136341.pdf, ComponentLink3Description=https://datasheet.ciiva.com/6439/eng-ds-1773266-a-6439080.pdf, ComponentLink3URL=https://datasheet.ciiva.com/6439/eng-ds-1773266-a-6439080.pdf, ComponentLink4Description=https://datasheet.ciiva.com/6439/eng-ds-1773266-a-6439081.pdf, ComponentLink4URL=https://datasheet.ciiva.com/6439/eng-ds-1773266-a-6439081.pdf, ComponentLink5Description=https://datasheet.ciiva.com/6439/eng-ds-1773266-a-6439083.pdf, ComponentLink5URL=https://datasheet.ciiva.com/6439/eng-ds-1773266-a-6439083.pdf, Dimension="3.2 x 1.6 x 1.25mm", Family=RC, Mounting="Surface Mount", Packaging="Tape and Reel", Part No=1625854-1, Pricing 1="1=0.28, 10=0.261, 25=0.224, 50=0.1902, 100=0.1828, 250=0.1641, 500=0.1567, 1000=0.1306 (USD)", RoHS=Yes, Stock 1=31937, Supplier 1=Digi-Key, Temperature Coefficient=N/R, Terminal Pitch=N/R, Termination Style=N/R, Tolerance=N/R
U200: "IC REG LINEAR 3.3V 300MA SOT23-5", Case/Package=SOT-23-5, Dropout Voltage=125mV, Manufacturer="Texas Instruments", Manufacturer Part Number=TLV73333PDBVR, Max Input Voltage=5.5V, Max Operating Temperature=125°C, Max Output Current=300mA, Min Current Limit=360mA, Min Input Voltage=1.4V, Min Operating Temperature=-40°C, Output Voltage=3.3V, Package Quantity=3000, Quiescent Current=60uA, Supplier Part Number 1=296-40673-1-ND, Accuracy=1%, ComponentLink1Description=https://datasheet.ciiva.com/48677/tlv733p-48677542.pdf, ComponentLink1URL=https://datasheet.ciiva.com/48677/tlv733p-48677542.pdf, Contact Plating=Nickel,Gold, Lead Free="Lead Free", Mount="Surface Mount", Number of Outputs=1, Number of Pins=5, Number of Regulators=1, Output Current=300mA, Packaging="Tape and Reel", Polarity=Positive, Pricing 1="1=0.46, 10=0.373, 100=0.2538, 500=0.19034, 1000=0.14276 (USD)", Radiation Hardening=No, Stock 1=44968, Supplier 1=Digi-Key, Weight=0.000557oz
U300: "ARM? Cortex?-M4 STM32 F3 Microcontroller IC 32-Bit 72MHz 64KB (64K x 8) FLASH 32-LQFP (7x7)", Manufacturer=STMicroelectronics, Manufacturer Part Number=STM32F303K8T6, Operating Temperature="-40°C ~ 85°C (TA)", Package / Case=32-LQFP, Supplier Device Package="32-LQFP (7x7)", Supplier Part Number 1=497-15828-ND, Voltage - Supply (Vcc/Vdd)="2 V ~ 3.6 V", Category="Integrated Circuits (ICs)", ComponentLink1Description=http://www.st.com/web/en/resource/technical/document/datasheet/DM00092070.pdf, ComponentLink1URL=http://www.st.com/web/en/resource/technical/document/datasheet/DM00092070.pdf, Connectivity="CAN, I2C, IrDA, LIN, SPI, UART/USART", Core Processor="ARM? Cortex?-M4", Core Size=32-Bit, Data Converters="A/D 9x12b, D/A 3x12b", EEPROM Size=-, Family="Embedded - Microcontrollers", Number of I/O=10, Oscillator Type=Internal, Packaging=Tray, Peripherals="DMA, I2S, POR, PWM, WDT", Pricing 1="1=4.28, 10=3.846, 100=3.1512, 500=2.6826, 1000=2.2624 (USD)", Program Memory Size="64KB (64K x 8)", Program Memory Type=FLASH, RAM Size="12K x 8", Series="STM32 F3", Speed=72MHz, Stock 1=848, Supplier 1=Digikey
U301 U302: "SWITCH TACTILE SPST-NO 0.05A 12V", Contact Rating @ Voltage="0.05A @ 12VDC", Illumination Type, Color=-, Manufacturer="C&K Components", Manufacturer Part Number="PTS645SH50SMTR92 LFS", Operating Force=200gf, Operating Temperature="-20°C ~ 60°C", Supplier Part Number=CKN9085TR-ND, Supplier Part Number 1=CKN9085CT-ND, Actuator Height off PCB, from Pins=5.00mm, Actuator Material="Polyamide (PA66), Nylon 6/6", Actuator Orientation="Top Actuated", Actuator Type=Standard, Category=Switches, Circuit=SPST-NO, Features=-, Illumination=Non-Illuminated, Illumination Voltage (Nominal)=-, Ingress Protection=-, Mechanical Life="100,000 Cycles", Mounting Type="Surface Mount", Outline="6.00mm x 6.00mm", Packaging="Tape & Reel (TR)", RoHS="RoHS Compliant", Supplier=Digi-Key, Supplier 1=Digi-Key, Switch Function=Off-Mom, Switch Travel=-, Termination Style="Gull Wing"
U800: "IC USB TO I2C/UART 14SOIC", Case/Package=SOIC, Manufacturer=Microchip, Manufacturer Part Number=MCP2221A-I/SL, Max Operating Temperature=85°C, Min Operating Temperature=-40°C, Operating Supply Current=13mA, Supplier Part Number 1=MCP2221A-I/SL-ND, Interface=I2C,UART, Packaging=Rail/Tube, Pricing 1="1=1.95, 25=1.6276, 100=1.4832 (USD)", Stock 1=1104, Supplier 1=Digi-Key
X300: library part CRYSTAL_NX3215SA-32.768K, "CRYSTAL 32.768KHZ 12.5PF SMD", ESR (Equivalent Series Resistance)="70 kOhm", Frequency=32.768kHz, Frequency Tolerance=±20ppm, Load Capacitance=12.5pF, Manufacturer="Nihon Dempa Kogyo (NDK)", Manufacturer Part Number=NX3215SA-32.768K-STD-MUA-8, Operating Mode=Fundamental, Operating Temperature="-40°C ~ 85°C", Package / Case=2-SMD, Standard Package=1, Supplier Part Number 1=644-1156-1-ND, Catalog Drawings="NX3215SA Series Top /  / NX3215SA Series Side /  / NX3215SA Series Bottom /  / NX3215SA Series Circuit", Category="Crystals and Oscillators", ComponentLink1Description=https://datasheet.ciiva.com/857/c-nx3215sa-std-mua-9-e-857050.pdf, ComponentLink1URL=https://datasheet.ciiva.com/857/c-nx3215sa-std-mua-9-e-857050.pdf, ComponentLink2Description=https://datasheet.ciiva.com/857/c-nx3215sa-std-mua-9-e-857051.pdf, ComponentLink2URL=https://datasheet.ciiva.com/857/c-nx3215sa-std-mua-9-e-857051.pdf, ComponentLink3Description=https://datasheet.ciiva.com/857/c-nx3215sa-std-mua-9-e-857052.pdf, ComponentLink3URL=https://datasheet.ciiva.com/857/c-nx3215sa-std-mua-9-e-857052.pdf, Dynamic Catalog="NX3215SA Series", Family=Crystals, Featured Product="NX3215SA Series 32.768KHz SMD Crystals", Height="0.035\" (0.90mm)", Mounting Type="Surface Mount", Other Names=644-1156-6, Packaging=Digi-Reel?, Pricing 1="1=0.94, 10=0.835, 50=0.7804, 100=0.6897, 500=0.6534, 1000=0.5445 (USD)", Series=NX3215SA, Size / Dimension="0.126\" L x 0.059\" W (3.20mm x 1.50mm)", Stock 1=45314, Supplier 1=Digikey, Type="kHz Crystal (Tuning Fork)"

## Via types
v1: diameter 30, hole 15, Top Layer to Bottom Layer, 123 vias

## Nets (pads, with @x,y where several pads share a name; then routed paths per layer and width w, separated by ;. In a path a pad name is that pad's centre, name@x,y a point inside that pad or via, vN(x,y) a via of type N, cw(c..) or ccw(c..) an arc to the next point about the centre after c; other vN are vias at no path point)
3.3V: C201.2 C302.2 C303.2 C304.2 C800.2 C801.2 D300.2 R300.2 R302.2 TP203.1 U200.5 U300.1 U300.5 U300.17 U800.1 U800.4 U800.11 | length 1928.4
  Bottom Layer w10: R302.2@2846.06,329.13 R302.2 ; 2956.04,772.2 2961.9,766.34 ; C304.2@2956.04,893.77 C304.2 C304.2@2962.27,896.06 ; U200.5 U200.5@3086.21,3562.6 ; U300.5 3138.13,871.05 3165.75,898.67 v1(3165.75,900) 3177.17,911.42 C303.2 ; v1(3214.57,1072.99) R300.2@3300,1072.99 ; C801.2 C801.2@3236.38,279.48 ; U300.17 U300.17@3234.5,431.78 ; C800.2@3358.19,273.09 C800.2 ; C201.2 C201.2@3466.24,3580.22 ; U800.4@3600,645.98 U800.4 ; U800.11 v1(3600,948.98) ; C302.2@3694.61,426.62 C302.2@3701.44,419.79 ; v1@3806.72,560.88 v1@3810.54,564.71
  Bottom Layer w25: v1(2775.6,289.76) 2806.69,289.76 R302.2@2846.06,329.13 ; 2956.04,772.2 v1(2956.04,814.43) C304.2@2956.04,893.77 ; 2961.9,766.34 U300.1@3002.79,766.34 ; U200.5@3086.21,3562.6 3148.81,3500 v1(3466.24,3500) ; C201.2@3466.24,3580.22 v1(3466.24,3500) ; D300.2 v1(3646.53,426.62) C302.2@3694.61,426.62 ; U800.4@3600,645.98 3685.1,560.88 v1@3806.72,560.88 ; TP203.1 v1(3466.24,3500) ; U800.1@3750,651.84 3750,625.25 v1@3810.54,564.71
  other v1: 3271,361.38 3814.37,560.88
5.0V: J800.1 S200.1 S200.4 TP201.1 U200.3 | length 1615.3
  Bottom Layer w10: S200.4 1220.28,3815.24 S200.4@1238.9,3833.86 ; J800.1 J800.1@1515.59,3779.49 ; TP201.1@2743.58,3743.58 TP201.1 TP201.1@2811.5,3780
  Bottom Layer w25: 1508.93,3808.27 1508.93,3812.09 1521.53,3824.69 2046.37,3824.69 2127.48,3743.58 TP201.1@2743.58,3743.58 ; TP201.1@2811.5,3780 2953.41,3638.09 2969.38,3638.09 U200.3
BOOT0: R301.2 U300.31 | length 171.4
  Bottom Layer w10: R301.2 2785.75,678.74 U300.31
BUTTON: R302.1 U300.27 U302.3 U302.4 | length 892.1
  Bottom Layer w10: U302.3 2266.81,289.76 2594.37,289.76 2676.18,289.76 2786.42,400 R302.1 2850,510.34 2891.41,551.75 2982.65,551.75 U300.27@2983.66,552.76
BUZZER: R700.1 U300.21 | length 202.7
  Bottom Layer w10: R700.1 3018.08,310.22 3104.4,396.54 3104.4,431.43 U300.21
BUZZER_R: D700.1 PZ700.1 R700.2 | length 1213.2
  Bottom Layer w10: PZ700.1 2177.62,296.75 2177.62,218.82 2208.62,187.82 2796.77,187.82 2834.59,150 D700.1 2889.7,150 2928.6,188.89 2928.6,249.04 R700.2
D+: J800.3 U800.13 | length 4000.4
  Bottom Layer w10: J800.3 1563.9,3709.17 3864.46,1408.62 3864.46,950.43 3844.46,930.43 3709.6,930.43 3700,920.83 U800.13
D-: J800.2 U800.12 | length 4027.8
  Bottom Layer w10: J800.2 1540.2,3774.73 1540.2,3695.97 3844.46,1391.71 3844.46,958.71 3836.17,950.43 3679.6,950.43 3650,920.83 U800.12
GND: C200.1 C201.1 C300.1 C301.1 C302.1 C303.1 C304.1 C400.1 C401.1 C402.1 C403.1 C404.1 C405.1 C406.1 C407.1 C408.1 C409.1 C410.1 C411.1 C412.1 C413.1 C414.1 C415.1 C416.1 C417.1 C418.1 C419.1 C500.1 C501.1 C502.1 C503.1 C504.1 C505.1 C506.1 C507.1 C508.1 C509.1 C510.1 C511.1 C512.1 C513.1 C514.1 C515.1 C516.1 C517.1 C518.1 C519.1 C600.1 C601.1 C602.1 C603.1 C604.1 C605.1 C606.1 C607.1 C608.1 C609.1 C610.1 C611.1 C612.1 C613.1 C800.1 C801.1 D400.3 D401.3 D402.3 D403.3 D404.3 D405.3 D406.3 D407.3 D408.3 D409.3 D410.3 D411.3 D412.3 D413.3 D414.3 D415.3 D416.3 D417.3 D418.3 D419.3 D500.3 D501.3 D502.3 D503.3 D504.3 D505.3 D506.3 D507.3 D508.3 D509.3 D510.3 D511.3 D512.3 D513.3 D514.3 D515.3 D516.3 D517.3 D518.3 D519.3 D600.3 D601.3 D602.3 D603.3 D604.3 D605.3 D606.3 D607.3 D608.3 D609.3 D610.3 D611.3 D612.3 D613.3 D700.2 J200.4 J300.3 J300.4 J800.5 J800.SH1 J800.SH2 J800.SH3 J800.SH4 J800.SH5 J800.SH6 PZ700.2 Q200.1 R301.1 TP202.1 TP204.1 U200.2 U300.16 U300.32 U301.1 U301.2 U302.1 U302.2 U800.14 | length 9043.4
  Top Layer w10: C606.1@3498.71,2963.28 3501.98,2960.01 v1(3501.98,2863.37)